# Altium PCB V2.5.0_ChipSat.PcbDoc (part 2 of 2)
Units mm, origin at the board's own origin, x right, y up, seen from the top; angles counter-clockwise.
Board outline 50 x 60 mm, 2 copper layers (Top Layer, Bottom Layer), stack 1.57 mm thick; 76 components, 53 nets, 284 pads, 115 vias.
Unrouted connection lines stored in the file: 2.
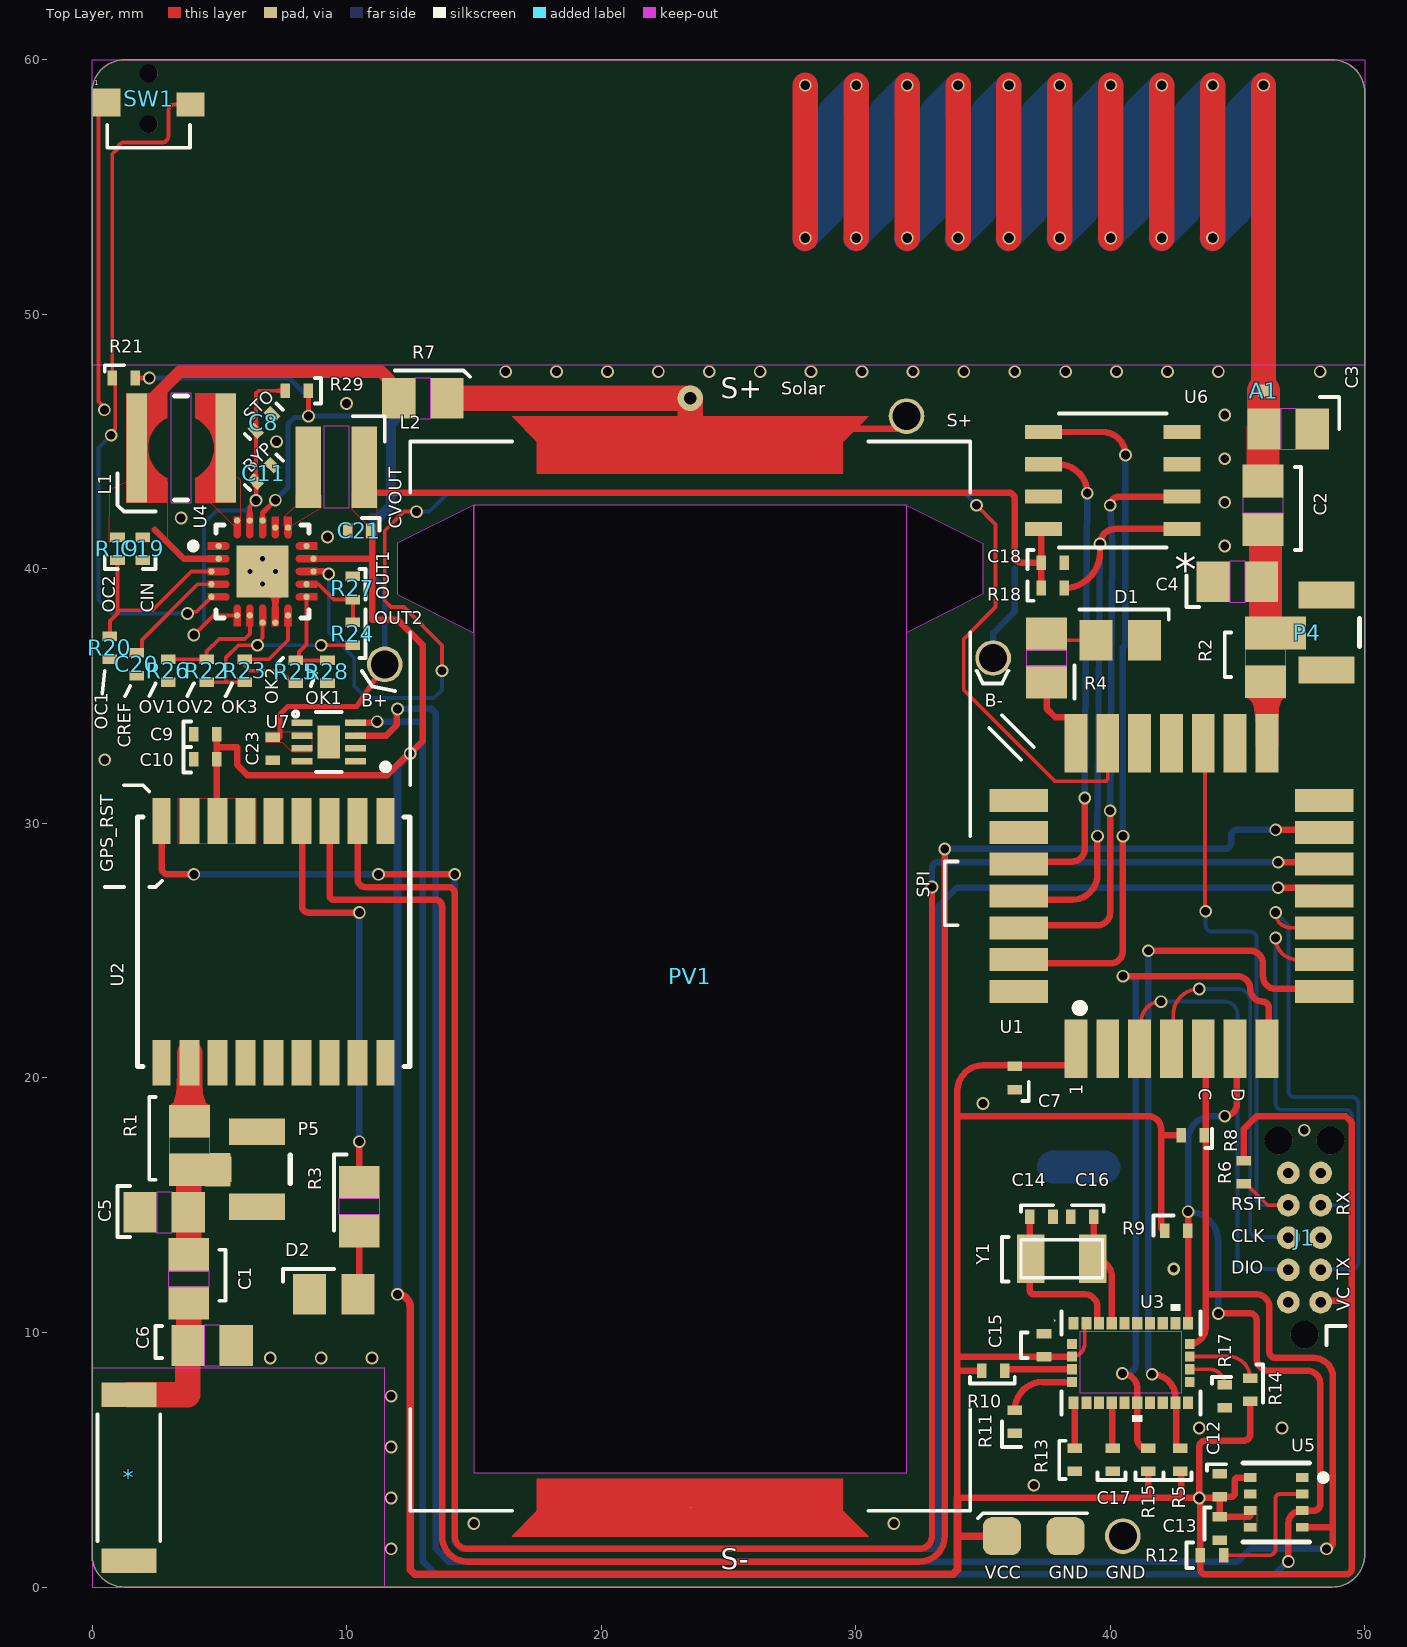
[diagram p0: Top Layer view]

## Silkscreen, mask and mechanical layers (free items; w line width, h text height) (continued)
Bottom Overlay: (continued)
  text "H" at 11.08,52.17 h0.5 r180
  text "W" at 9.394,49.855 h0.5
  text "CBAT" at 13.72,47.28 h0.5
  text "S+" at 25.8,46.7 h0.8
  text "B+" at 14.42,44.08 h0.5
  text "B-" at 30.67,44.08 h0.5
  text "B+" at 9.42,40.08 h0.5
  text "B-" at 38.42,40.08 h0.5
  text "5.62M" at 45.67,39.33 h0.5
  text "ROV1" at 49.67,39.33 h0.5
  text "7.32M" at 45.67,38.33 h0.5
  text "ROV2" at 49.67,38.33 h0.5
  text "5.11M" at 45.67,36.83 h0.5
  text "ROK1" at 49.67,36.83 h0.5
  text "6.81M" at 45.67,35.83 h0.5
  text "ROK2" at 49.67,35.83 h0.5
  text "1.27M" at 45.67,34.83 h0.5
  text "ROK3" at 49.67,34.83 h0.5
  text "4.87M" at 45.67,33.33 h0.5
  text "ROUT1" at 49.67,33.33 h0.5
  text "8.25M" at 45.67,32.33 h0.5
  text "ROUT2" at 49.67,32.33 h0.5
  text "50" at 38.92,20.42 h0.5 r90
  text "L" at 37.92,14.92 h0.5 r90
  text "O" at 37.92,9.92 h0.5 r90
  text "S" at 37.92,4.92 h0.5 r90
  text "S-" at 25.8,0.7 h0.8

## Text inside footprints (layer, text, board x,y; h text height)
SW1: Top Overlay "1" at 0.08,59.005 h0.2
U3: Top Overlay "*" at 37.764,10.322 h0.2
U6: Top Overlay "*" at 43.396,41.138 h1.27 r180